# Altium PCB Engineering_Design_Project_BM_Group-4.PcbDoc
Units mm, origin at the board's own origin, x right, y up, seen from the top; angles counter-clockwise.
Board outline 86 x 50 mm, 2 copper layers (Top Layer, Bottom Layer); 16 components, 15 nets, 81 pads, 0 vias.
Unrouted connection lines stored in the file: 1.
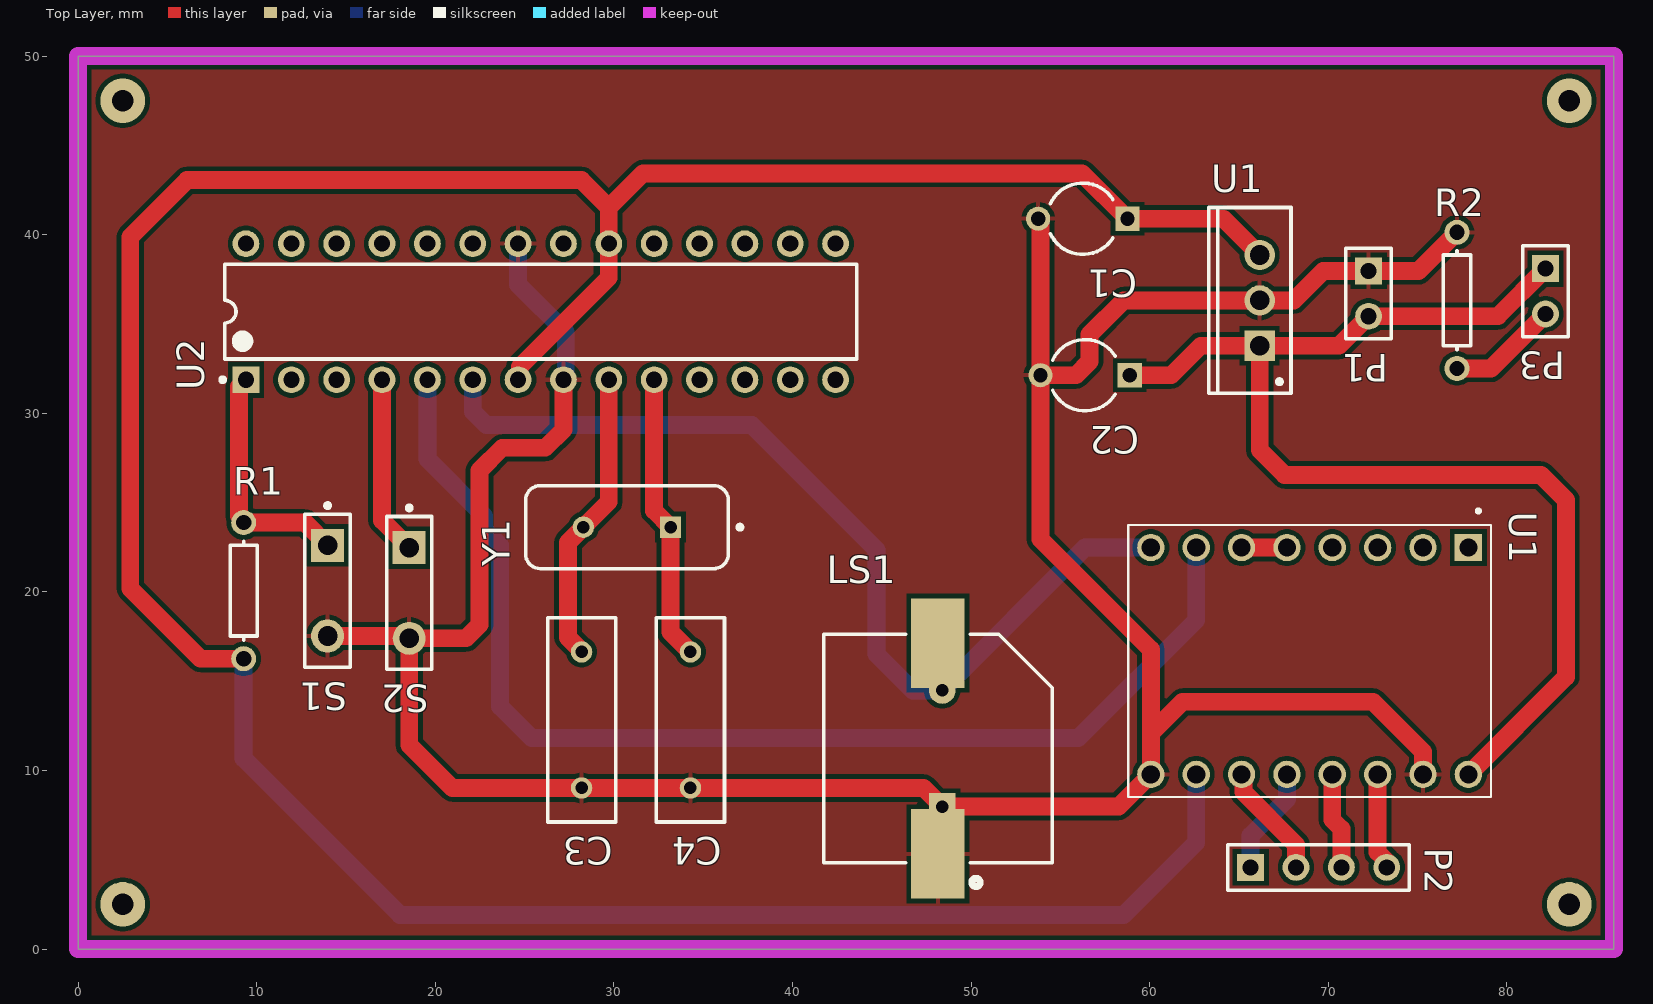
[diagram p0: Top Layer view]
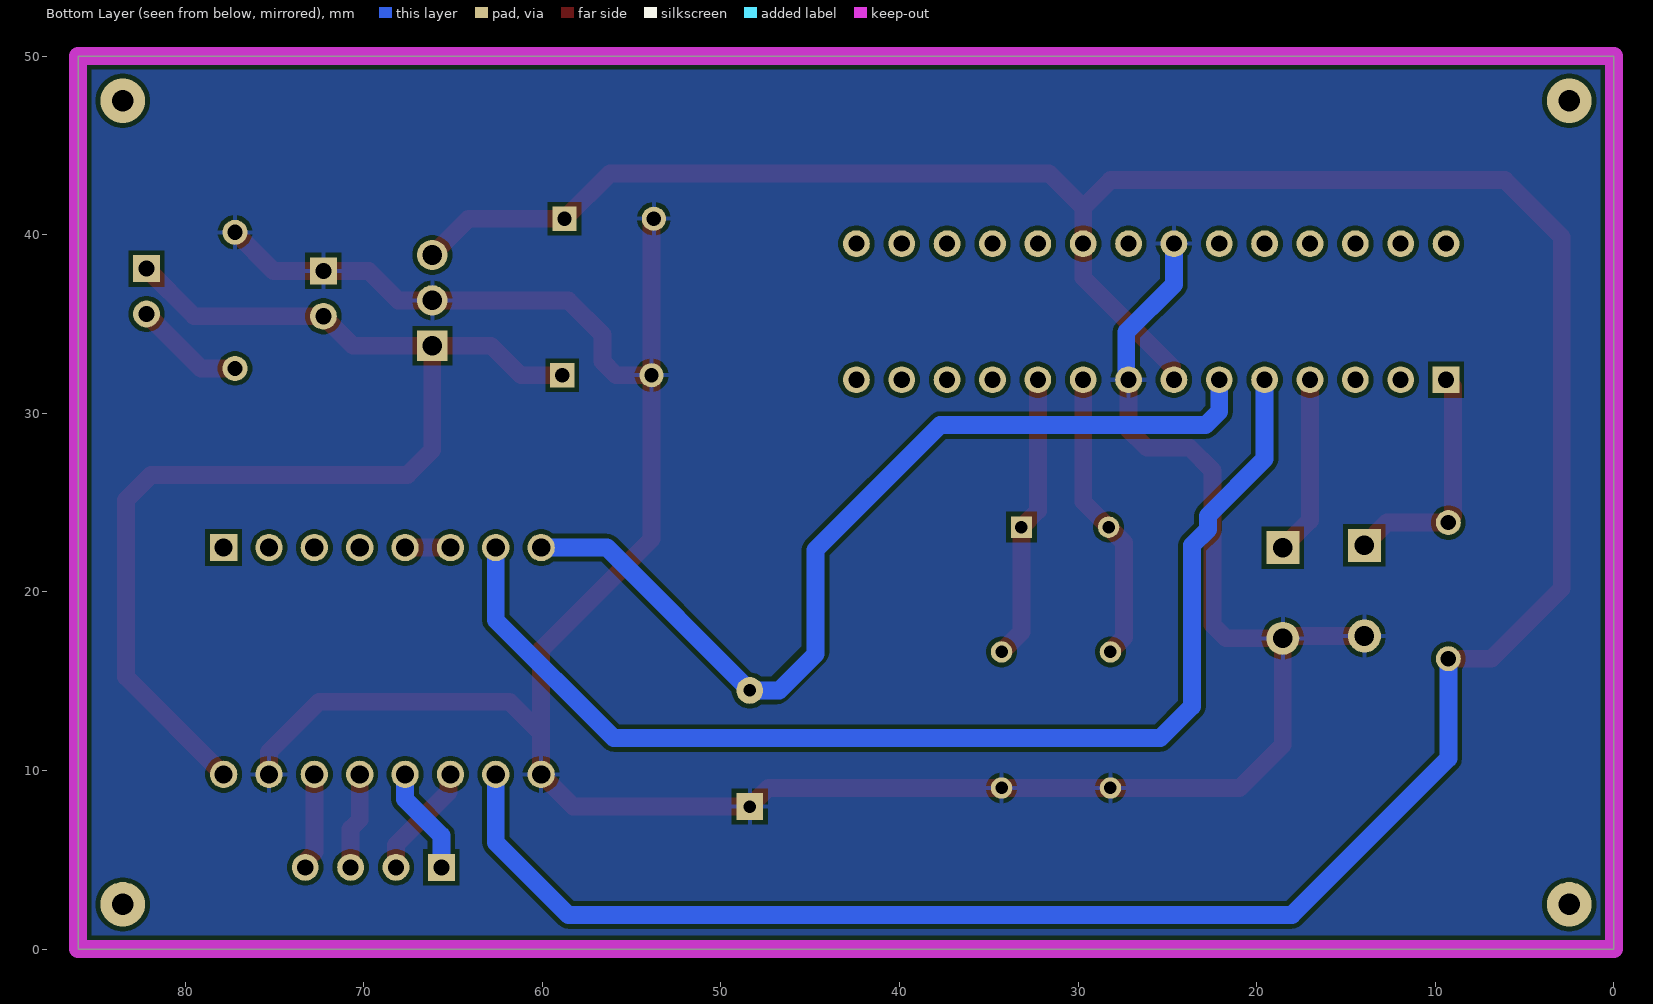
[diagram p1: Bottom Layer view, seen from below]

## Layer stack, top to bottom
Top Solder: solder mask 0.0102, Solder Resist, Dk 3.5
Top Layer: signal copper 0.0356
Dielectric 1: dielectric 0.32, FR-4, Dk 4.8
Bottom Layer: signal copper 0.0356
Bottom Solder: solder mask 0.0102, Solder Resist, Dk 3.5

## Board outline
0,0 0,50 86,50 86,0

## Design rules (kind name [scope] priority, off if disabled: settings)
Clearance [All] p1: gap=0.254 ignorepadtopadclearanceinfootprint=FALSE except(0: Arc-Hole Track-Hole SMDPad-Hole THPad-Hole Via-Hole Fill-Hole Poly-Hole Region-Hole Text-Hole)
PolygonConnect [All] p1: connectstyle=Relief reliefconductorwidth=0.254 reliefentries=4 polygonreliefangle="90 Angle" airgapwidth=0.254
RoutingVias [All] p1: holewidth=0.711 width=1.27 viastyle="Through Hole" minholewidth=0.711 minwidth=1.27 maxholewidth=0.711 maxwidth=1.27
SolderMaskExpansion [All] p1: expansion=0.102 istentingtop=FALSE
Width [All] p1: maxlimit=0.254 minlimit=0.254 preferedwidth=0.254
30 further rules are at their usual default settings.

## Classes and differential pairs
component class Pahansith: C1 C2 LS1 P2 P3 R1 R2 S1 S2 U2 Y1

## Components (designator, comment, footprint, x,y, rotation, side; value= is the part's Value field where it differs from the comment)
C1 "Cap2" CAPR5-4X5 56.261,40.894 r180 top value=10uF
C2 "Cap2" CAPR5-4X5 56.388,32.131 r180 top value=10uF
C3 "Cap" RAD-0.3 28.194,12.827 r270 top value=22pF
C4 "Cap" RAD-0.3 34.29,12.827 r270 top value=22pF
LS1 "Buzzer" ABSM-1574 48.147,5.328 r90 top
P1 "Header 2" HDR1X2 72.263,37.973 r270 top
P2 "Header 4" HDR1X4 65.659,4.572 r0 top
P3 "Header 2" HDR1X2 82.169,38.1 r270 top
R1 "Res1" AXIAL-0.3 9.271,20.066 r90 top value=1K
R2 "Res1" AXIAL-0.3 77.216,36.322 r90 top value=1K
S1 "SW-PB" SPST-2 13.97,20.066 r270 top
S2 "SW-PB" SPST-2 18.542,19.939 r270 top
U1 "A4988_STEPPER_MOTOR_DRIVER_CARRIER" MODULE_A4988_STEPPER_MOTOR_DRIVER_CARRIER 68.961,16.129 r270 top
U1 "L7805CV" TO220 66.167,36.322 r90 top
U2 "ATmega328P-PU" 28P3 25.908,35.687 r90 top
Y1 "FOXSLF/160-20" FOX-FOXSLF160-20 30.734,23.622 r180 top

## Footprints (in the part's own frame and the unit in brackets; to place one, negate y for a bottom-side part, rotate by r counter-clockwise, add the part's x,y. Pads: shape width x height; smd on the part's side, far side on the other; paste and mask are expansions set on the pad)
28P3 [mm] "28-Pin Plastic Dual In-Line Package (PDIP)"
  rect 1.5x1.5 hole 0.9: 1(-3.81,16.51)
  round 1.5 hole 0.9: 2(-3.81,13.97) 3(-3.81,11.43) 4(-3.81,8.89) 5(-3.81,6.35) 6(-3.81,3.81) 7(-3.81,1.27) 8(-3.81,-1.27) 9(-3.81,-3.81) 10(-3.81,-6.35) 11(-3.81,-8.89) 12(-3.81,-11.43) 13(-3.81,-13.97) 14(-3.81,-16.51) 15(3.81,-16.51) 16(3.81,-13.97) 17(3.81,-11.43) 18(3.81,-8.89) 19(3.81,-6.35) 20(3.81,-3.81) 21(3.81,-1.27) 22(3.81,1.27) 23(3.81,3.81) 24(3.81,6.35) 25(3.81,8.89) 26(3.81,11.43) 27(3.81,13.97) 28(3.81,16.51)
  silkscreen extent -3.93,-17.7 2.65,17.93, body extent -3.6,-17.65 3.6,17.65, height 4.58
ABSM-1574 [mm] "Magnetic Transducer Buzzer"
  rect 5x3 smd: 1(0,0) 2(11.8,0)
  rect 1.5x1.5 hole 0.7: 1A(2.65,-0.24)
  round 1.5 hole 0.7: 2A(9.15,-0.24)
  silkscreen extent -1.83,-6.4 12.3,6.4
AXIAL-0.3 [mm] "Axial Device, Thru-Hole; 2 Leads; 0.3 in Pin Spacing"
  round 1.4 hole 0.85: 1(-3.81,0) 2(3.81,0)
  silkscreen extent -2.77,-0.76 2.77,0.76
CAPR5-4X5 [mm] "Capacitor; 2 Leads"
  rect 1.35x1.35 hole 0.8: 1(-2.5,0)
  round 1.35 hole 0.8: 2(2.5,0)
  silkscreen extent -1.69,-2 1.82,2
FOX-FOXSLF160-20 [mm] "THD, 2-Leads, Body 11.35x4.65mm"
  rect 1.2x1.2 hole 0.7: 1(-2.44,0)
  round 1.2 hole 0.7: 2(2.44,0)
  silkscreen extent -6.45,-2.32 5.68,2.32, body extent -5.67,-2.32 5.68,2.33, height 3.6
HDR1X2 [mm] "Connector; Header; 2 Position"
  rect 1.5x1.5 hole 0.9: 1(0,0)
  round 1.5 hole 0.9: 2(2.54,0)
  silkscreen extent -1.27,-1.27 3.81,1.27
HDR1X4 [mm] "Connector; Header; 4 Position"
  rect 1.5x1.5 hole 0.9: 1(0,0)
  round 1.5 hole 0.9: 2(2.54,0) 3(5.08,0) 4(7.62,0)
  silkscreen extent -1.27,-1.27 8.89,1.27
MODULE_A4988_STEPPER_MOTOR_DRIVER_CARRIER [mm]
  rect 1.53x1.53 hole 1.02: 1(-6.35,8.89)
  round 1.53 hole 1.02: 2(-6.35,6.35) 3(-6.35,3.81) 4(-6.35,1.27) 5(-6.35,-1.27) 6(-6.35,-3.81) 7(-6.35,-6.35) 8(-6.35,-8.89) 9(6.35,-8.89) 10(6.35,-6.35) 11(6.35,-3.81) 12(6.35,-1.27) 13(6.35,1.27) 14(6.35,3.81) 15(6.35,6.35) 16(6.35,8.89)
  silkscreen extent -8.5,-10.16 7.62,10.16
RAD-0.3 [mm] "Radial Cap, Thru-Hole; 2 Leads; 0.3 in Pin Spacing"
  round 1.2 hole 0.7: 1(-3.81,0) 2(3.81,0)
  silkscreen extent -5.71,-1.91 5.71,1.91
SPST-2 [mm] "Switch; 2 Leads"
  rect 1.85x1.85 hole 1.1: 1(-2.54,0)
  round 1.85 hole 1.1: 2(2.54,0)
  silkscreen extent -4.89,-1.27 4.28,1.27
TO220 [mm] "TO, Thru-Hole, Vertical, Heatsink Mounted; 3 In-Line Leads; Pitch 2.54 mm"
  rect 1.7x1.7 hole 1.1: 1(-2.54,0)
  round 1.7 hole 1.1: 2(0,0) 3(2.54,0)
  silkscreen extent -5.2,-1.75 5.2,2.85, body extent -5.25,-1.8 5.25,2.9, height 19.7

## Part data
C1 C2 C3 C4: "Capacitor", Publisher="Altium Limited"
  C1 C2: PackageDescription="Capacitor; 2 Leads", PackageReference=CAPR5-4X5, Published=23-Sep-2002
  C3 C4: LatestRevisionDate=17-Jul-2002, LatestRevisionNote="Re-released for DXP Platform.", PackageDescription="Radial Cap, Thru-Hole; 2 Leads; 0.3 in Pin Spacing", PackageReference=RAD-0.3, Published=8-Jun-2000
LS1: "Magnetic Transducer Buzzer", ComponentLink1Description="Manufacturer Link", ComponentLink1URL=http://www.megastar.com/linecard/buzzmode/index.php, DatasheetVersion=17-Dec-2003, LatestRevisionDate=17-Dec-2003, LatestRevisionNote="Schematic revised, PCB Footprint replaced.", PackageDescription="Magnetic Transducer Buzzer", PackageReference=ABSM-1574, Published=24-Mar-1999, Publisher="Altium Limited"
P1 P3: "Header, 2-Pin", LatestRevisionDate=17-Jul-2002, LatestRevisionNote="Re-released for DXP Platform.", Publisher="Altium Limited"
P2: "Header, 4-Pin", LatestRevisionDate=17-Jul-2002, LatestRevisionNote="Re-released for DXP Platform.", Publisher="Altium Limited"
R1 R2: "Resistor", LatestRevisionDate=17-Jul-2002, LatestRevisionNote="Re-released for DXP Platform.", PackageDescription="Axial Device, Thru-Hole; 2 Leads; 0.3 in Pin Spacing", PackageReference=AXIAL-0.3, Published=8-Jun-2000, Publisher="Altium Limited"
S1 S2: "Switch", LatestRevisionDate=17-Jul-2002, LatestRevisionNote="Re-released for DXP Platform.", PackageDescription="Switch; 2 Leads", PackageReference=SPST-2, Published=24-Mar-1999, Publisher="Altium Limited"
U1: "Stepper motor controler; IC: A4988; 1A; Uin mot: 8Ã·35V", Package=None, Availability=Unavailable, MP=A4988_STEPPER_MOTOR_DRIVER_CARRIER, Price=None
U1: library part CMP-0244-00483-1, "Positive Voltage Regulator, 5V, 3-Pin TO-220", ComponentLink1Description="Manufacturer URL", ComponentLink1URL=http://www.st.com, ComponentLink2Description=Datasheet, ComponentLink2URL=http://www.st.com/internet/com/TECHNICAL_RESOURCES/TECHNICAL_LITERATURE/DATASHEET/CD00000444.pdf, ComponentLink3Description="Package Specification", ComponentLink3URL=http://www.st.com/internet/com/TECHNICAL_RESOURCES/TECHNICAL_LITERATURE/PACKAGE_INFORMATION/CD00004649.pdf, DatasheetVersion=16/11/2011, PackageDescription="TO, Thru-Hole, Vertical, Heatsink Mounted; 3 In-Line Leads; Pitch 2.54 mm", PackageReference=TO220, PackageVersion=ver3.0
U2: library part CMP-0095-00013-2, "8-bit AVR Microcontroller, 32KB Flash, 1KB EEPROM, 2KB SRAM, 28-pin PDIP, Industrial Grade (-40°C to 85°C)", ComponentLink1Description="Manufacturer URL", ComponentLink1URL=http://www.atmel.com/, ComponentLink2Description="ATmega48A/48PA/88A/88PA/168A/168PA/328/328P Datasheet", ComponentLink2URL=http://www.atmel.com/dyn/resources/prod_documents/8271.pdf, ComponentLink3Description="ATmega48A/48PA/88A/88PA/168A/168PA/328/328P Summary", ComponentLink3URL=http://www.atmel.com/dyn/resources/prod_documents/8271S.pdf, DatasheetVersion="revD, May-2011", PackageDescription="28-lead (0.300\"/7.62mm Wide) Plastic Dual Inline Package (PDIP)", PackageReference=28P3, PackageVersion="revB, Sep-2001", RevisionNote="DatasheetVersion updated. URLs added."
Y1: library part CMP-1749-00003-1, "Resistance Weld Thru-Hole Crystal, 16 MHz, -20 to 70 degC, 2-Pin THD, RoHS, Bulk", Case\Package=Axial, Max Operating Temperature="155 degC", Min Operating Temperature="-55 degC", Package Quantity=200, Power Rating="250 mW", Resistance="221 kohm", Tolerance=1%, Voltage Rating="250 V", ComponentLink1Description="Manufacturer URL", ComponentLink1URL=http://www.foxonline.com/, ComponentLink2Description=Datasheet, ComponentLink2URL=http://www.foxonline.com/pdfs/hc49slf.pdf, DatasheetVersion=Mar-15, Length="0.248 inch", Mount="Through Hole", PackageDescription="2-Pin Through Hole Device, Body 11.35 x 4.65 mm", PackageReference=FOXSLF160-20, Packaging=Bulk, RoHSCompliant=true

## Free pads (board coordinates)
  round 2.5 hole 1.2: 1(2.5,2.5) 2(2.5,47.5) 3(83.5,47.5) 4(83.5,2.5)

## Nets (pads, with @x,y where several pads share a name; then routed paths per layer and width w, separated by ;. In a path a pad name is that pad's centre, name@x,y a point inside that pad or via, vN(x,y) a via of type N, cw(c..) or ccw(c..) an arc to the next point about the centre after c; other vN are vias at no path point)
+9: C2.1 P1.2 P3.1 U1.1@66.167,33.782 U1.16 | length 67.5
  Top Layer w1: C2.1 61.214,32.131 62.865,33.782 U1.1@66.167,33.782 ; U1.16 83.312,15.24 83.312,25.146 81.915,26.543 67.564,26.543 66.167,27.94 U1.1@66.167,33.782 ; P3.1 79.502,35.433 P1.2 70.612,33.782 U1.1@66.167,33.782
gnd: C1.2 C2.2 C3.2 C4.2 LS1.1 LS1.1A P1.1 R2.2 S1.2 S2.2 U1.2@66.167,36.322 U1.9 U1.15 U2.8 U2.22 | length 164.1
  Top Layer w0.254: 60.049,12.087 60.071,12.065
  Top Layer w1: S1.2 18.415,17.526 S2.2 ; U2.8 27.178,29.083 26.162,28.067 23.749,28.067 22.479,26.797 22.479,18.161 21.717,17.399 S2.2 ; C1.2 53.761,40.799 53.888,40.672 C2.2 ; U1.15 75.311,11.049 72.517,13.843 61.849,13.843 60.071,12.065 ; R2.2 75.057,37.973 P1.1 69.723,37.973 68.072,36.322 66.167,36.322 58.547,36.322 56.642,34.417 56.642,32.893 55.88,32.131 C2.2 ; S2.2 18.542,11.43 20.955,9.017 C3.2 C4.2 47.348,9.017 LS1.1A 58.27,7.978 U1.9 60.071,12.065 ; C2.2 53.888,22.947 60.071,16.764 60.071,12.065
  Bottom Layer w0.254: U2.8 U2.8@27.305,32.004
  Bottom Layer w1: U2.22 24.638,37.211 27.305,34.544 U2.8@27.305,32.004
NetC1_1: C1.1 R1.1 U1.3@66.167,38.862 U1.10 U2.7 U2.20 | length 175.5
  Top Layer w0.254: 29.718,41.529 29.718,41.656
  Top Layer w1: R1.1 6.858,16.256 2.921,20.193 2.921,39.878 6.096,43.053 28.194,43.053 29.718,41.529 ; U2.7 24.734,31.973 24.734,32.608 29.718,37.592 29.718,41.529 ; U1.3@66.167,38.862 64.135,40.894 C1.1 56.221,43.434 31.623,43.434 29.718,41.529
  Bottom Layer w1: R1.1 9.271,10.668 18.034,1.905 58.547,1.905 62.611,5.969 U1.10
NetC3_1: C3.1 U2.9 Y1.2 | length 16.5
  Top Layer w1: C3.1 28.194,16.688 27.432,17.45 27.432,22.76 29.718,25.046 U2.9
NetC4_1: C4.1 U2.10 Y1.1 | length 16.1
  Top Layer w1: U2.10 32.258,24.538 Y1.1 33.174,17.753 C4.1
NetLS1_2: LS1.2 LS1.2A U1.8 U2.6 | length 53
  Bottom Layer w1: U2.6 22.098,30.099 22.86,29.337 37.719,29.337 44.704,22.352 44.704,16.51 46.736,14.478 LS1.2A 56.388,22.479 U1.8
NetP2_1: P2.1 U1.12 | length 6
  Bottom Layer w1: P2.1 65.659,6.35 67.691,8.382 U1.12
NetP2_2: P2.2 U1.11 | length 6.5
  Top Layer w1: U1.11 65.252,9.678 65.252,8.789 68.199,5.842 P2.2
NetP2_3: P2.3 U1.13 | length 5.4
  Top Layer w1: U1.13 70.231,7.239 70.739,6.731 P2.3
NetP2_4: P2.4 U1.14 | length 5.4
  Top Layer w0.254: P2.4 P2.4@73.279,4.909
  Top Layer w1: U1.14 72.771,5.417 P2.4@73.279,4.909
NetP3_2: P3.2 R2.1 | length 6.5
  Top Layer w0.254: R2.1@76.906,32.512 R2.1
  Top Layer w1: R2.1 79.121,32.512 P3.2
NetR1_2: R1.2 S1.1 U2.1 | length 13.5
  Top Layer w1: U2.1 9.017,31.496 9.017,24.238 9.271,23.984 R1.2 12.7,23.876 S1.1
NetS2_1: S2.1 U2.4 | length 10
  Top Layer w1: U2.4 17.018,24.003 S2.1
NetU1_5: U1.5 U1.6 | length 2.5
  Top Layer w1: U1.6 U1.5
NetU1_7: U1.7 U2.5 | length 66.5
  Bottom Layer w1: U2.5 19.558,27.432 22.733,24.257 22.733,23.495 23.622,22.606 23.622,13.589 25.4,11.811 56.007,11.811 62.611,18.415 U1.7
pads on no net: U1.1@77.851,22.479 U1.2@75.311,22.479 U1.3@72.771,22.479 U1.4 U2.2 U2.3 U2.11 U2.12 U2.13 U2.14 U2.15 U2.16 U2.17 U2.18 U2.19 U2.21 U2.23 U2.24 U2.25 U2.26 U2.27 U2.28

## Polygon pours and split planes (outlines as drawn)
gnd on Bottom Layer "bottomNET_L02_P-001" (solid, pour order 0): 0,0 0,50.038 85.979,50.038 85.979,0
gnd on Top Layer "bottomNET_L02_P-001" (solid, pour order 1): 0,0 0,50.038 85.979,50.038 85.979,0

## Keep-outs
Keep-Out Layer:
  the board outline again, w1